# EAGLE board footprint (EAGLE 9.7.0)
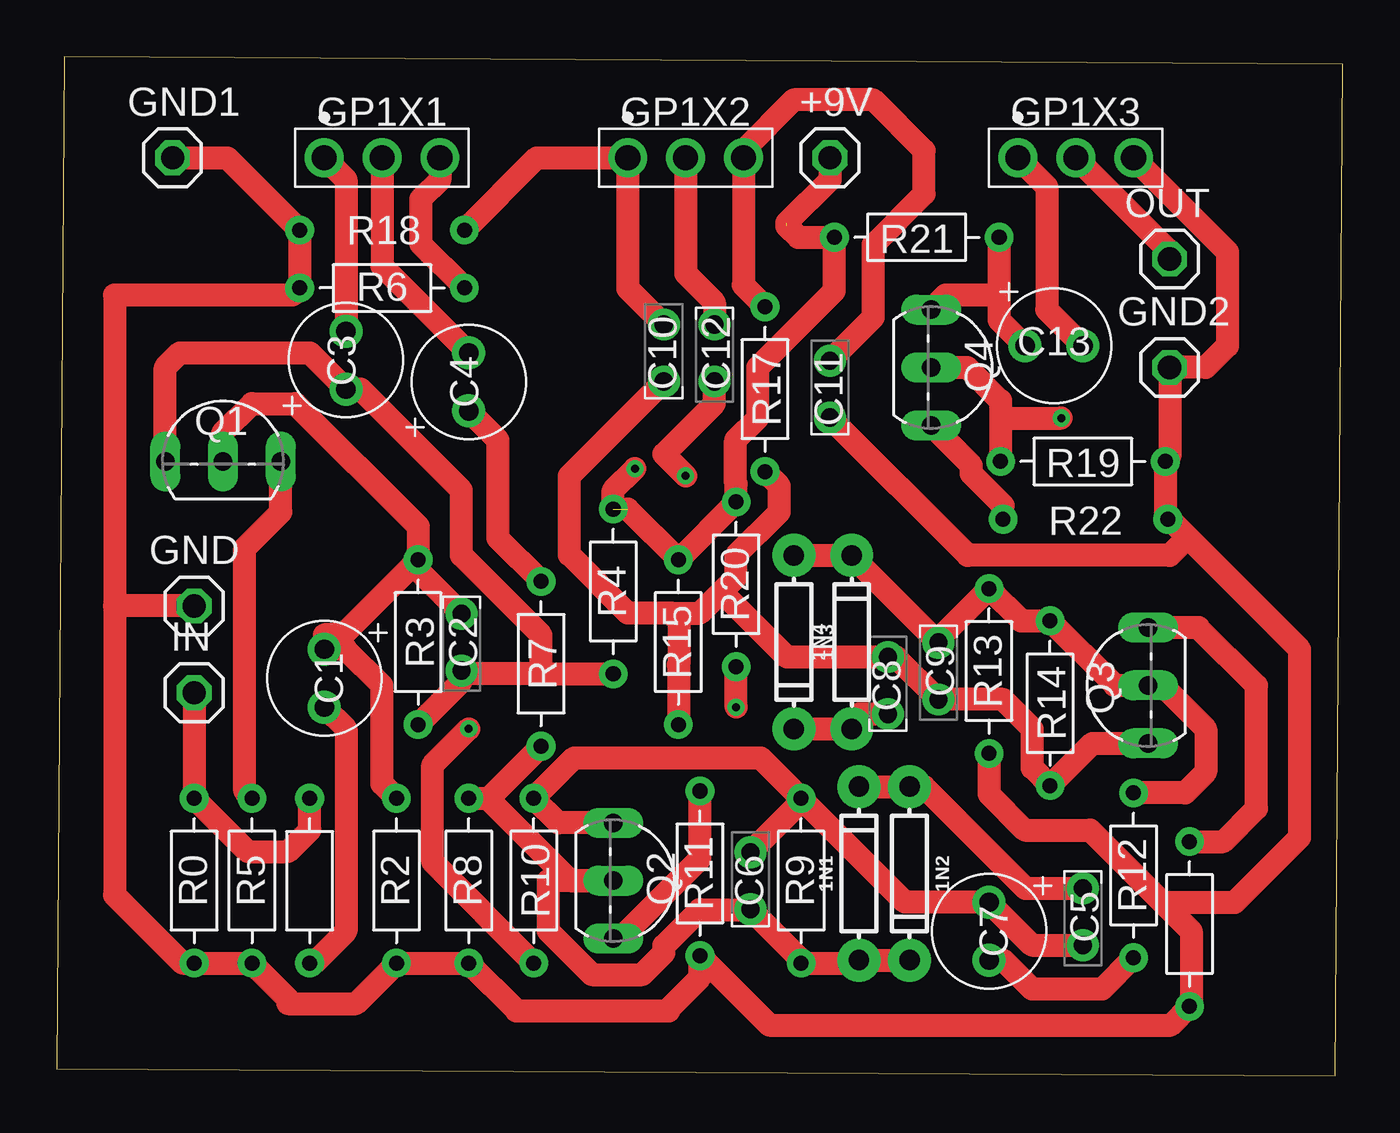
[diagram p0: board, top side]
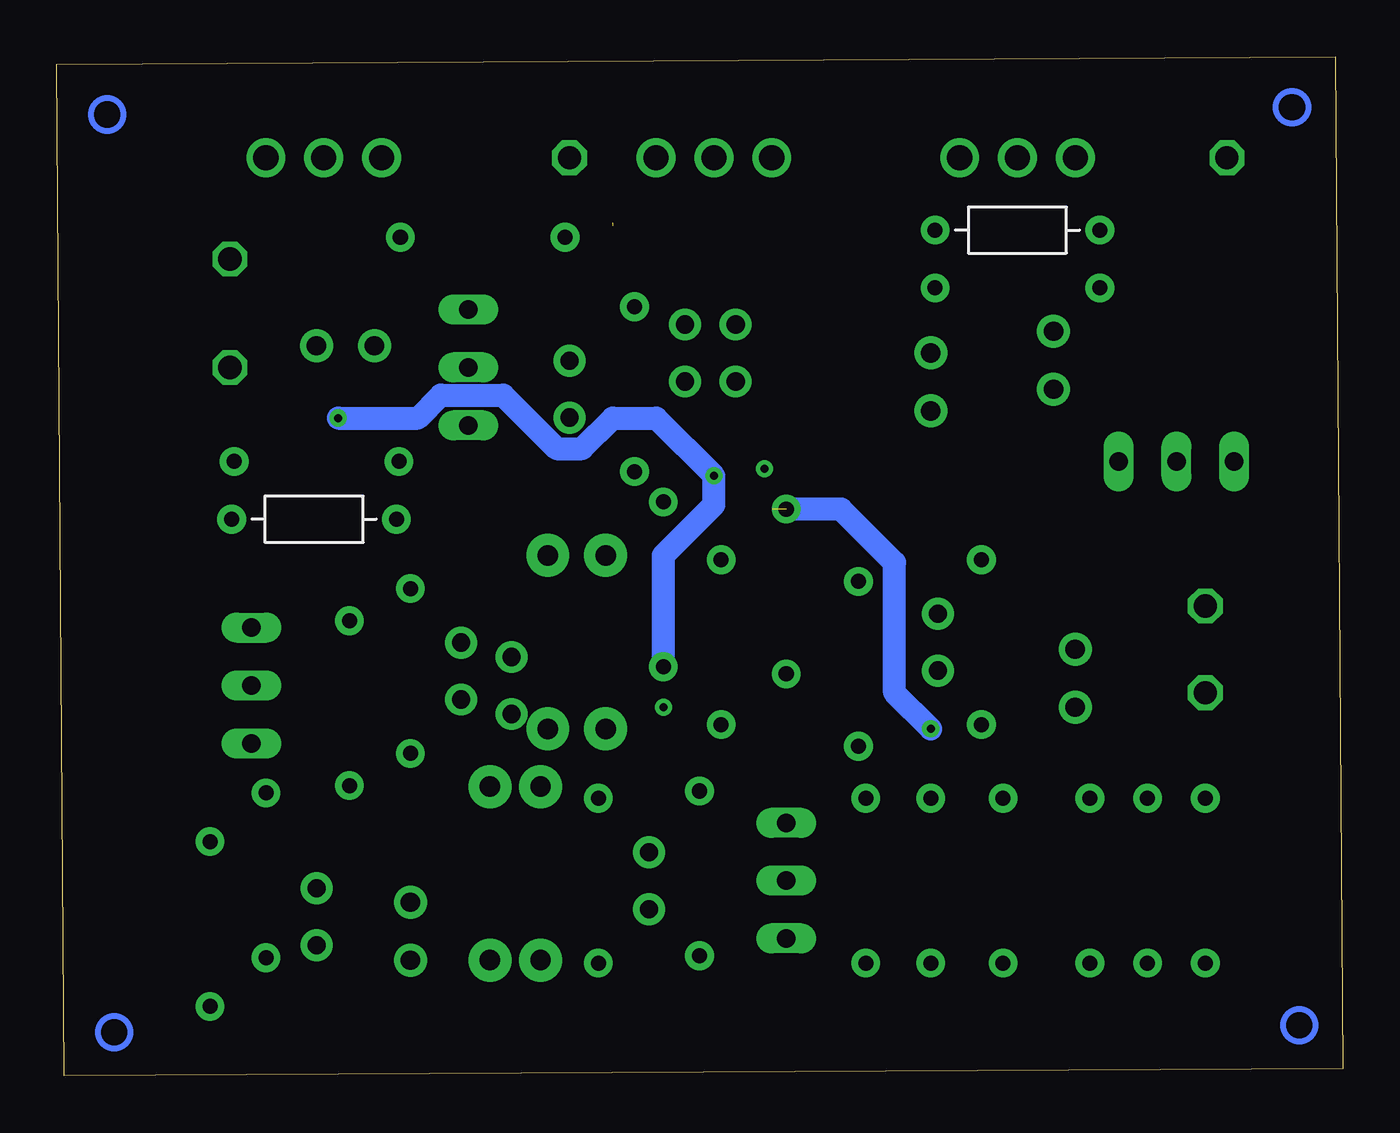
[diagram p1: board, bottom side, seen from below]

Size 56.5 x 44.76 mm. Coordinates in mm from the lower left corner, seen from the top.
Outline: 0,0.32 56.18,0 56.5,44.44 0.32,44.76 0,0.32
Copper layers (1*16): Top / Bottom
Stack-up Default Layer Stack: Top User Defined 0.035mm / Dielectric-1 User Defined 1.5mm / Bottom User Defined 0.035mm
Design rules: minimum copper width 6mil, minimum drill size 0.35mm, copper clearance wire_polygon to wire_polygon 6mil, copper clearance wire_polygon to pad_smd 6mil, copper clearance wire_polygon to via 6mil, copper clearance pad_smd to pad_smd 6mil, copper clearance pad_smd to via 6mil, copper clearance via to via 6mil, copper clearance smd to pad (same net) 6mil, copper clearance smd to via (same net) 6mil, copper clearance smd to smd (same net) 6mil, dimension clearance 40mil, restrict clearance 0mil, drill distance 6mil, keepout clearance 0mil

## Footprints (pad centres in the part's own frame; a part is rotated, then mirrored left to right if it is on the bottom)
DIODE-1N4148 = drill 0.9 pad 1.88: A -3.81,0; C 3.81,0
1X01 = drill 1.016 octagon: 1 0,0
CAP = drill 0.85 pad 1.45: 1 -1.275,0; 2 1.275,0
CAPPRR250W50L310T100H650B = drill 0.8 pad 1.4: 1 -1.25,0; 2 1.25,0
HDRV3W64P254_1X3_762X254X838B = drill 1.105 pad 1.705: 1 0,0; 2 2.54,0; 3 5.08,0
TO92-EBC = drill 0.813 long: B 0,-1.27; C -2.54,-1.27; E 2.54,-1.27
RESAD724W46L381D178B = drill 0.66 pad 1.26: 1 -3.62,0; 2 3.62,0

## Placement (x,y rotation side)
1N1  DIODE  [DIODE-1N4148]  35.24,8.89 90 top
1N2  DIODE  [DIODE-1N4148]  37.46,8.89 270 top
1N3  DIODE  [DIODE-1N4148]  32.38,19.05 270 top
1N4  DIODE  [DIODE-1N4148]  34.92,19.05 90 top
+9V  PINHD-1X1  [1X01]  33.97,40.32 0 top
C1  C  [CAP]  11.75,17.46 270 top
C2  CUN  [CAPPRR250W50L310T100H650B]  17.78,19.05 270 top
C3  C  [CAP]  12.7,31.43 90 top
C4  C  [CAP]  18.1,30.48 90 top
C5  CUN  [CAPPRR250W50L310T100H650B]  45.09,6.98 270 top
C6  CUN  [CAPPRR250W50L310T100H650B]  30.48,8.57 90 top
C7  C  [CAP]  40.96,6.35 270 top
C8  CUN  [CAPPRR250W50L310T100H650B]  36.51,17.15 90 top
C9  CUN  [CAPPRR250W50L310T100H650B]  38.73,17.78 270 top
C10  CUN  [CAPPRR250W50L310T100H650B]  26.67,31.75 90 top
C11  CUN  [CAPPRR250W50L310T100H650B]  33.97,30.16 90 top
C12  CUN  [CAPPRR250W50L310T100H650B]  28.89,31.75 270 top
C13  C  [CAP]  43.82,32.07 0 top
GND  PINHD-1X1  [1X01]  6.03,20.64 0 top
GND1  PINHD-1X1  [1X01]  5.08,40.32 0 top
GND2  PINHD-1X1  [1X01]  48.9,31.12 0 top
GP1X1  GP  [HDRV3W64P254_1X3_762X254X838B]  11.75,40.32 0 top
GP1X2  GP  [HDRV3W64P254_1X3_762X254X838B]  25.08,40.32 0 top
GP1X3  GP  [HDRV3W64P254_1X3_762X254X838B]  42.23,40.32 0 top
IN  PINHD-1X1  [1X01]  6.03,16.83 0 top
OUT  PINHD-1X1  [1X01]  48.9,35.88 0 top
Q1  BC550B  [TO92-EBC]  7.3,28.26 0 top
Q2  BC550B  [TO92-EBC]  25.72,8.57 270 top
Q3  BC550B  [TO92-EBC]  46.67,17.15 90 top
Q4  BC550B  [TO92-EBC]  39.69,31.12 270 top
R0  [RESAD724W46L381D178B]  6.03,8.57 90 top
R1  R1  [RESAD724W46L381D178B]  11.11,8.57 270 top
R2  [RESAD724W46L381D178B]  14.92,8.57 90 top
R3  [RESAD724W46L381D178B]  15.88,19.05 270 top
R4  [RESAD724W46L381D178B]  24.45,21.27 90 top
R5  [RESAD724W46L381D178B]  8.57,8.57 90 top
R6  [RESAD724W46L381D178B]  14.29,34.61 0 top
R7  [RESAD724W46L381D178B]  21.27,18.1 270 top
R8  [RESAD724W46L381D178B]  18.1,8.57 90 top
R9  [RESAD724W46L381D178B]  32.7,8.57 90 top
R10  [RESAD724W46L381D178B]  20.95,8.57 270 top
R11  [RESAD724W46L381D178B]  28.26,8.89 90 top
R12  [RESAD724W46L381D178B]  47.31,8.81 90 top
R13  [RESAD724W46L381D178B]  40.96,17.78 90 top
R14  [RESAD724W46L381D178B]  43.64,16.37 270 top
R15  [RESAD724W46L381D178B]  27.3,19.05 90 top
R16  R16  [RESAD724W46L381D178B]  49.77,6.67 90 top
R17  [RESAD724W46L381D178B]  31.12,30.16 270 top
R18  [RESAD724W46L381D178B]  14.29,37.15 0 bottom
R19  [RESAD724W46L381D178B]  45.09,26.99 180 top
R20  [RESAD724W46L381D178B]  29.84,21.59 90 top
R21  [RESAD724W46L381D178B]  37.78,36.83 180 top
R22  [RESAD724W46L381D178B]  45.2,24.45 0 bottom

## Library data of the parts
1N1-1N4 = Biblioteka
+9V GND GND1 GND2 IN OUT = Connector; CATEGORY: CONNECTOR; SUB-CATEGORY: PIN-HEADER
C1-C13 GP1X1-GP1X3 = lib
Q1-Q4 = transistor-npn
R0 R1-R22 = Resistor; CATEGORY: Resistor; SUB-CATEGORY: Fixed

## Nets
GND: C11.1 GND1.1 GND2.1 GND.1 GP1X3.3 R0.1 R2.1 R5.1 R6.1 R8.1 R11.1 R13.1 R16.1 R18.2 R19.1 R22.1
N$1: IN.1 R0.2 R1.1
N$2: C1.2 R1.2
N$3: C1.1 C2.1 Q1.B R2.2 R3.1
N$4: Q1.E R5.2
N$5: C2.2 C3.1 Q1.C R3.2 R4.1
N$7: C3.2 GP1X1.1
N$8: C4.2 GP1X1.2
N$9: GP1X1.3 R6.2
N$10: C4.1 R7.1
N$11: 1N1.A 1N2.C C6.1 Q2.B R7.2 R8.2 R9.1
N$12: C5.2 C6.2 C7.1 Q2.C R9.2 R10.1
N$13: 1N1.C 1N2.A C5.1
N$14: Q2.E R11.2
N$15: C7.2 R12.1
N$16: 1N3.A 1N4.C C9.1 Q3.B R12.2 R13.2 R14.1
N$17: C8.2 C9.2 C10.1 Q3.C R14.2 R15.1 R17.2
N$18: 1N3.C 1N4.A C8.1
N$19: Q3.E R16.2
N$20: C10.2 GP1X2.1 R18.1
N$21: C11.2 GP1X2.3 R17.1
N$22: C12.1 GP1X2.2
N$23: C12.2 Q4.B R19.2 R20.1
N$24: C13.1 Q4.C R21.1
N$25: Q4.E R22.2
N$26: C13.2 GP1X3.1
N$27: GP1X3.2 OUT.1
N$28: +9V.1 R4.2 R10.2 R15.2 R20.2 R21.2

## Tracks (layer width: path | path; a pad name or v marks a point on that pad's centre or on a via)
GND
  Top 1.016: GND1.1 7.49,40.32 R18.2 R6.1 10.35,34.29 2.54,34.29 2.54,20.64 | 2.54,20.64 2.54,7.94 5.52,4.95 R0.1 R5.1 10.16,3.37 10.16,3.18 13.14,3.18 R2.1 R8.1 20.19,2.86 26.89,2.86 26.89,2.95 28.26,4.32 R11.1 31.3,2.22 48.94,2.22 R16.1 49.85,3.13 49.85,6.35 48.58,7.62 | GP1X3.3 51.44,36.2 51.44,32.07 50.48,31.12 GND2.1 48.9,27.18 R19.1 48.7,24.56 | 48.7,24.56 R22.1 | R13.1 40.96,12.38 42.55,10.8 45.4,10.8 48.58,7.62 | 48.58,7.62 51.75,7.62 54.61,10.48 54.61,18.73 49.69,23.65 | 49.69,23.65 48.78,24.56 48.7,24.56 | GND.1 2.54,20.64 | C11.1 40.02,22.86 48.9,22.86 49.69,23.65
N$1
  Top 1.016: IN.1 R0.2 8.38,9.84 10.16,9.84 11.11,10.79 R1.1
N$2
  Top 1.016: C1.2 12.7,15.23 12.7,6.35 11.3,4.95 R1.2
N$3
  Top 1.016: Q1.B 7.3,28.26 8.57,29.53 10.48,29.53 15.88,24.13 R3.1 | R3.1 12.57,19.37 11.75,19.37 C1.1 12.7,18.74 14.29,17.15 14.29,12.83 R2.2 | C2.1 15.88,22.2 R3.1
N$4
  Top 1.016: R5.2 8.25,12.51 8.25,23.18 9.84,24.77 Q1.E
N$5
  Top 1.016: Q1.C 4.76,31.12 5.4,31.75 11.11,31.75 C3.1 13.34,30.16 17.78,25.72 17.78,22.86 21.27,19.37 21.27,17.65 | 21.27,17.65 R4.1 | 21.27,17.65 17.93,17.65 C2.2 17.78,17.34 R3.2
N$7
  Top 1.016: GP1X1.1 12.7,39.37 C3.2
N$8
  Top 1.016: GP1X1.2 14.29,35.57 C4.2
N$9
  Top 1.016: GP1X1.3 16.83,39.37 15.98,38.52 15.98,36.53 R6.2
N$10
  Top 1.016: C4.1 19.37,27.93 19.37,23.62 R7.1
N$11
  Top 1.016: R7.2 18.99,12.19 R8.2 18.92,12.19 22.54,8.57 Q2.B 21.59,8.57 21.59,6.36 23.51,4.45 25.72,4.45 26.67,5.4 26.67,5.72 28.26,7.3 30.46,7.3 C6.1 32.7,5.1 R9.1 35.12,4.95 1N1.A 1N2.C
N$12
  Top 1.016: R9.2 30.92,13.97 22.73,13.97 R10.1 22.04,11.11 Q2.C | C5.2 42.85,5.73 C7.1 37.27,7.62 R9.2 | C6.2 32.7,12.05 R9.2
N$13
  Top 1.016: C5.1 42.57,8.23 38.1,12.7 1N2.A 1N1.C
N$14
  Top 1.016: Q2.E 24.77,6.03 28.26,9.52 R11.2
N$15
  Top 1.016: R12.1 45.93,3.81 42.86,3.81 41.6,5.08 C7.2
N$16
  Top 1.016: R12.2 49.57,12.43 50.48,13.34 50.48,15.24 48.58,17.15 Q3.B 46.48,17.15 R14.1 42.37,19.99 R13.2 38.73,19.18 C9.1 35.22,22.54 35.22,22.56 1N4.C 1N3.A
N$17
  Top 1.016: 26.99,20.32 25.08,20.32 22.52,22.88 22.52,26.35 C10.1 | 26.99,20.32 28.26,20.32 29.21,21.27 | 29.21,21.27 29.84,21.91 29.84,22.86 31.75,24.77 31.75,25.91 R17.2 | Q3.C 45.5,14.61 R14.2 42.86,13.52 42.86,15.24 41.57,16.53 C9.2 36.87,18.4 C8.2 32.09,18.4 29.21,21.27 | R15.1 27.3,18.05 27.33,18.07 27.33,19.98 26.99,20.32
N$18
  Top 1.016: C8.1 35.26,15.9 34.92,15.56 1N4.A 1N3.C
N$19
  Top 1.016: R16.2 51.25,10.29 52.7,11.75 52.7,17.15 50.16,19.69 Q3.E
N$20
  Top 1.016: R18.1 21.08,40.32 GP1X2.1 25.08,34.59 C10.2
N$21
  Top 1.016: R17.1 30.16,34.74 GP1X2.3 30.16,40.64 32.38,42.86 35.88,42.86 38.1,40.64 38.1,38.74 35.88,36.51 35.88,33.32 C11.2 34.29,31.73
N$22
  Top 1.016: GP1X2.2 27.62,35.24 28.89,33.97 C12.1
N$23  (via drill 0.35)
  Top 1.016: Q4.B 40.01,31.12 41.47,29.66 41.47,28.89 | 41.47,28.89 R19.2 | C12.2 28.89,29.53 26.67,27.3 v27.62,26.35 | 41.47,28.89 v44.13,28.89 | v29.84,16.19 R20.1
  Bottom 1.016: R20.1 29.84,22.86 27.62,25.08 v27.62,26.35 30.16,28.89 32.07,28.89 33.41,27.55 34.54,27.55 36.88,29.9 39.62,29.9 40.63,28.89 v44.13,28.89
N$24
  Top 1.016: R21.1 41.4,34.29 | 41.4,34.29 41.4,33.21 C13.1 | Q4.C 39.05,34.29 41.4,34.29
N$25
  Top 1.016: Q4.E 40.18,26.82 40.18,26.45 41.58,25.05 R22.2
N$26
  Top 1.016: GP1X3.1 43.5,39.05 43.5,33.66 C13.2
N$27
  Top 1.016: GP1X3.2 48.9,36.2 OUT.1
N$28  (via drill 0.35)  (2 unrouted)
  Top 1.016: R10.2 16.51,9.4 16.51,13.65 v18.1,15.24 | +9V.1 33.97,39.37 32.07,37.46 | R4.2 24.45,25.72 v25.4,26.67 | 32.07,37.34 32.58,36.83 R21.2 34.16,34.48 30.8,31.12 30.8,28.89 29.83,27.92 29.83,26.01 29.84,25.99 R20.2 R15.2 25.08,24.89
  Bottom 1.016: v18.1,15.24 19.69,16.83 19.69,22.54 22.04,24.89 R4.2
(copper drawn outside any net)
  shapes: Bottom circle x4